# Altium PCB Term_PCB.PcbDoc
Units mm, origin at the board's own origin, x right, y up, seen from the top; angles counter-clockwise.
Board outline 80 x 65 mm, 2 copper layers (Top Layer, Bottom Layer), stack 1.57 mm thick; 64 components, 56 nets, 274 pads, 37 vias.
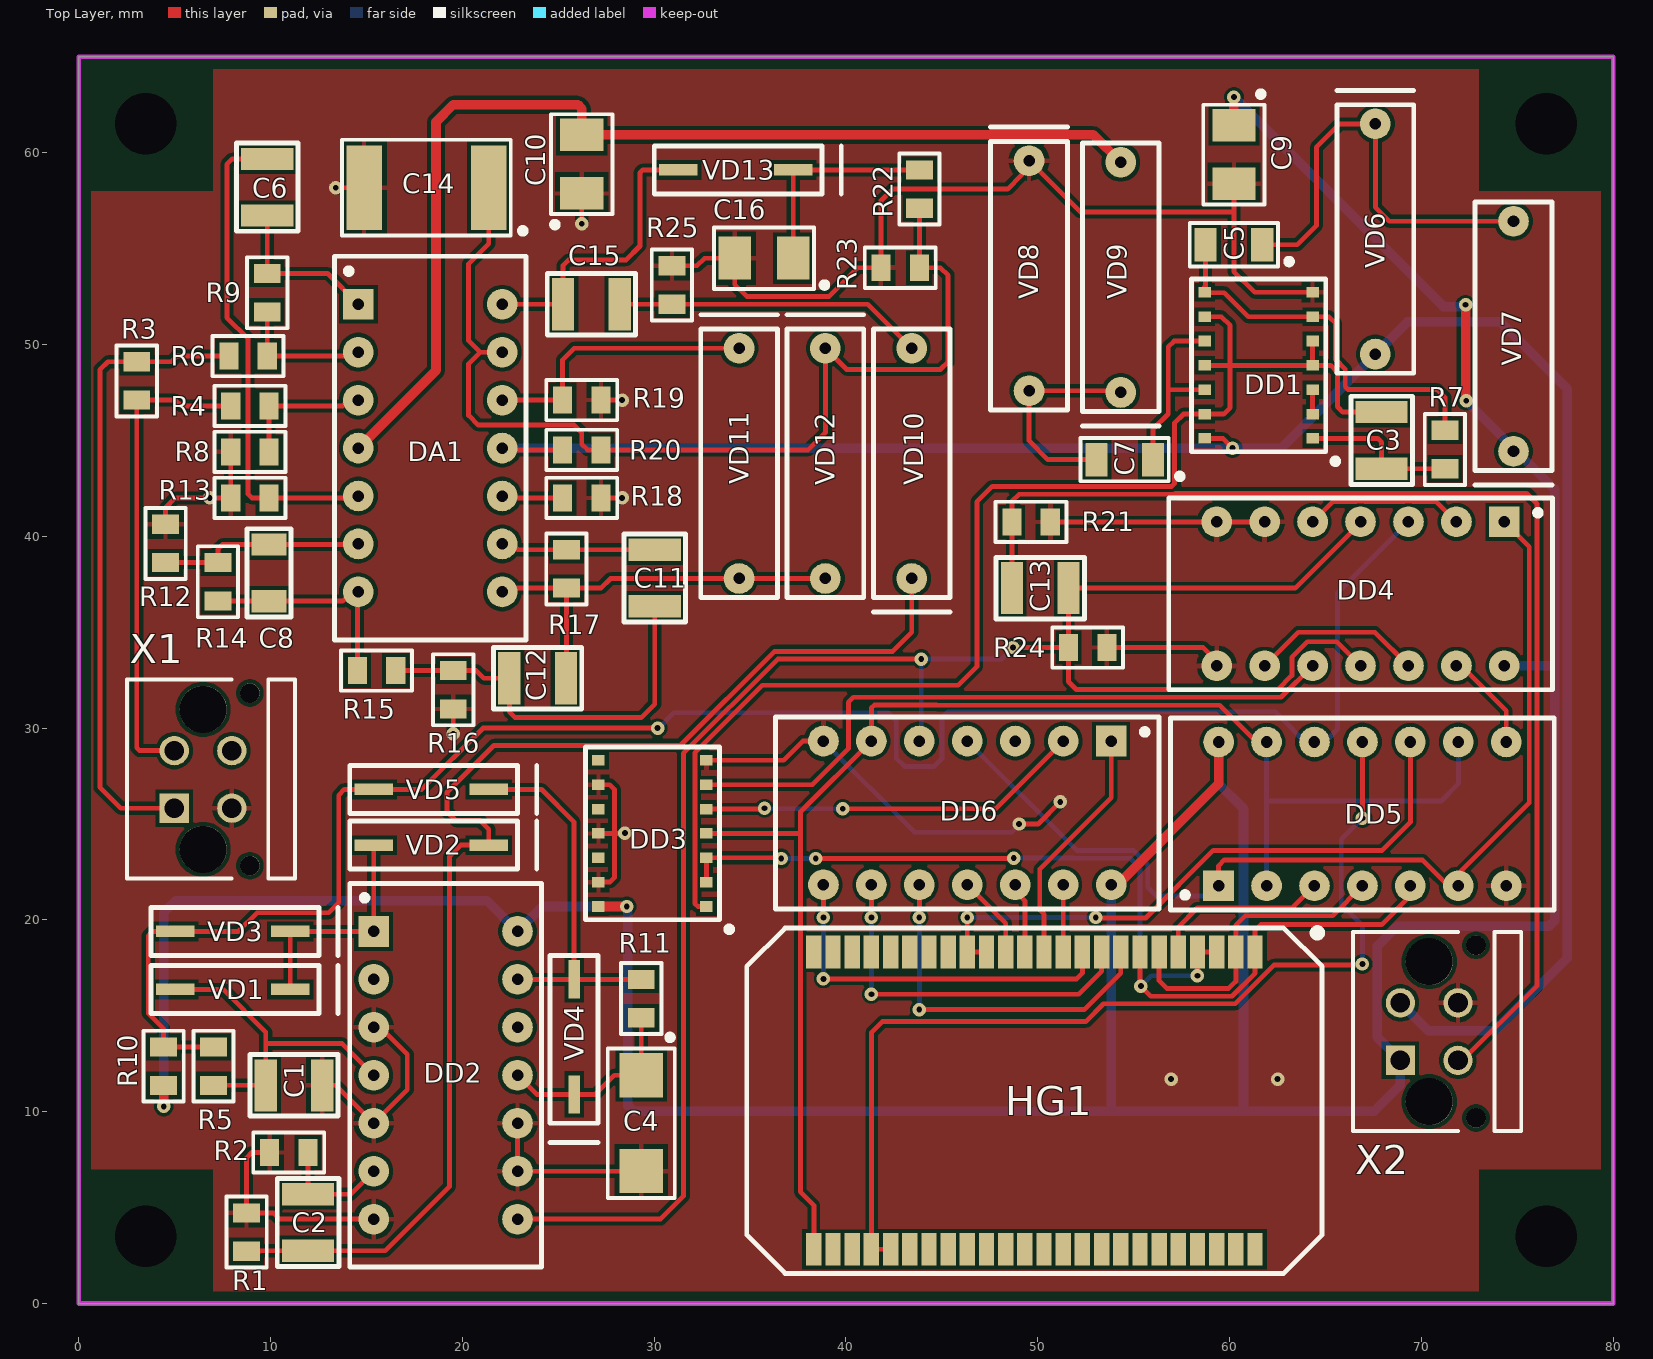
[diagram p0: Top Layer view]
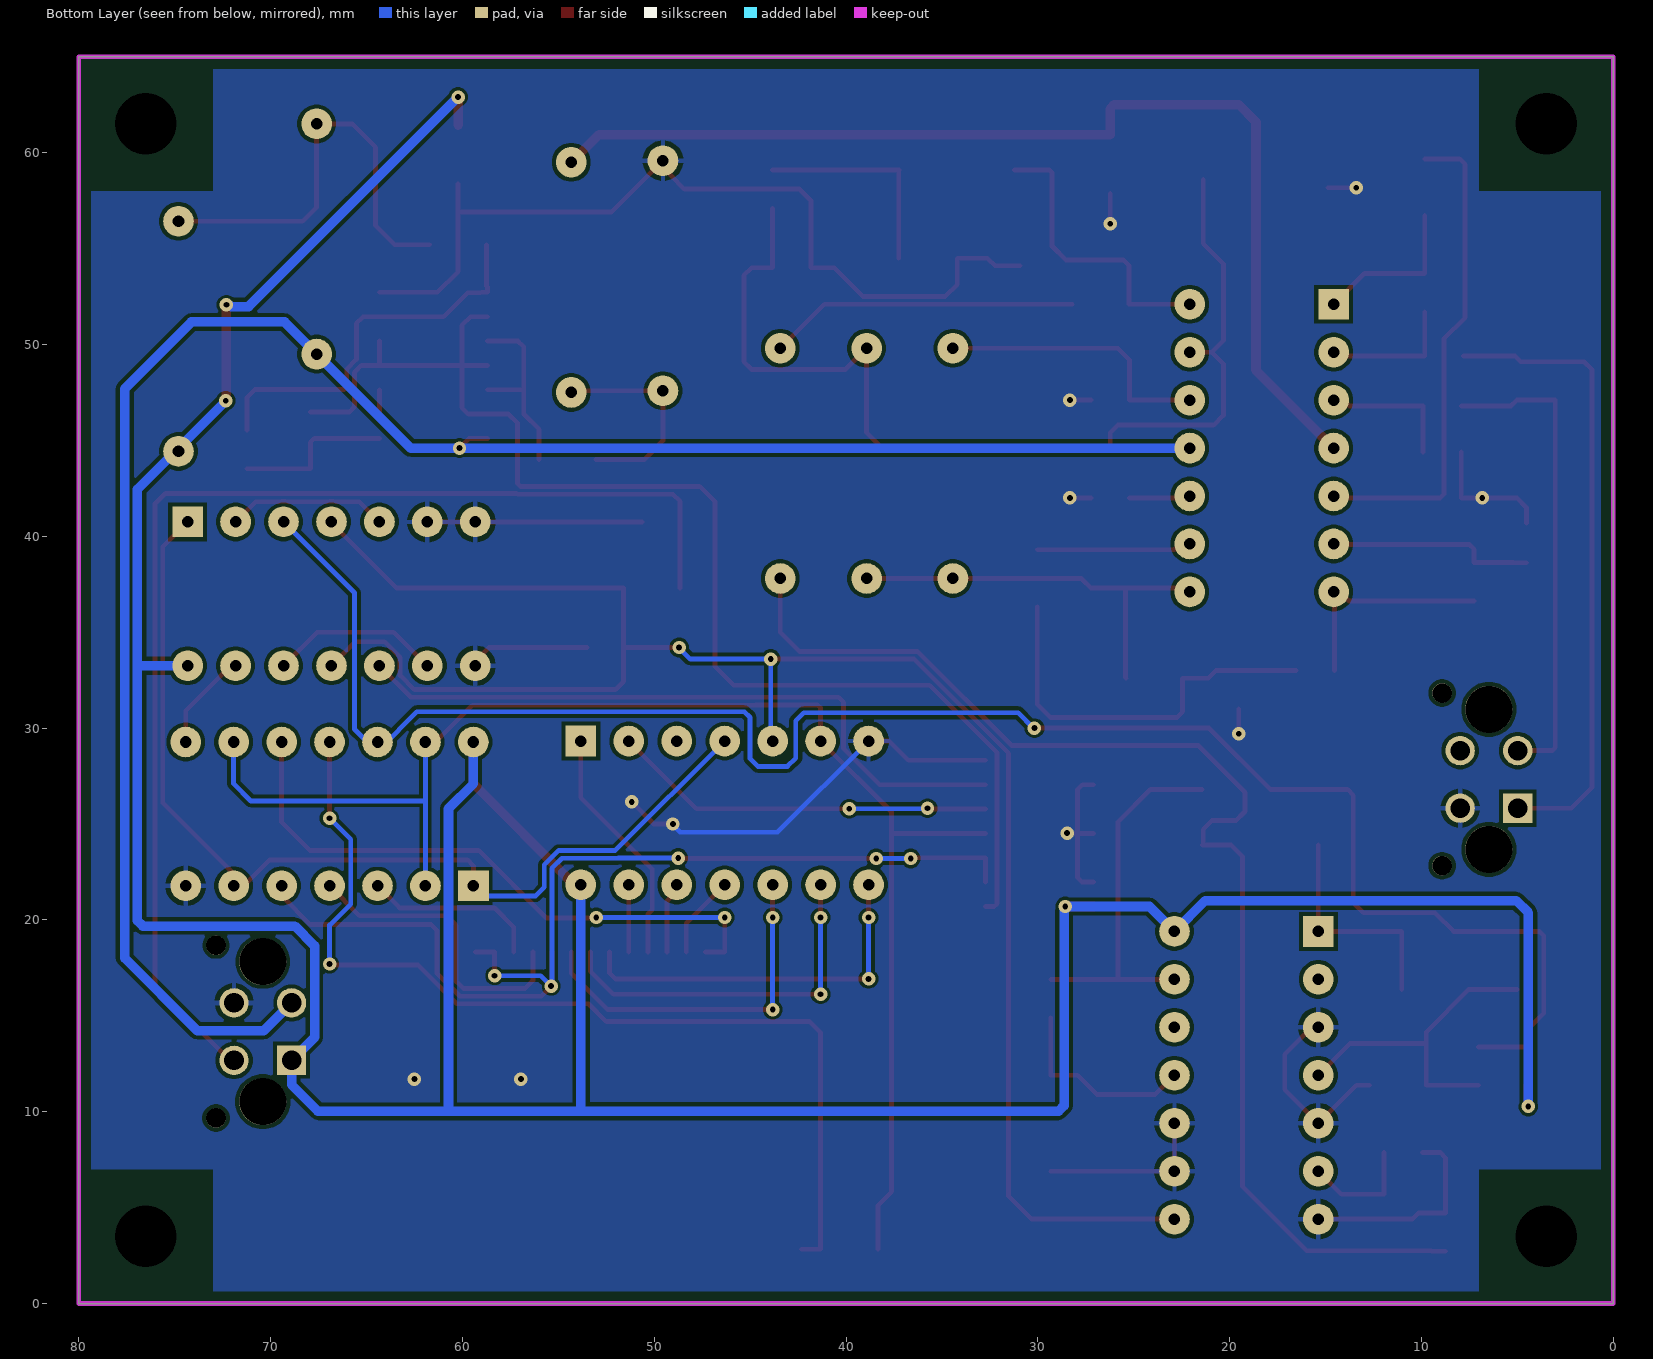
[diagram p1: Bottom Layer view, seen from below]
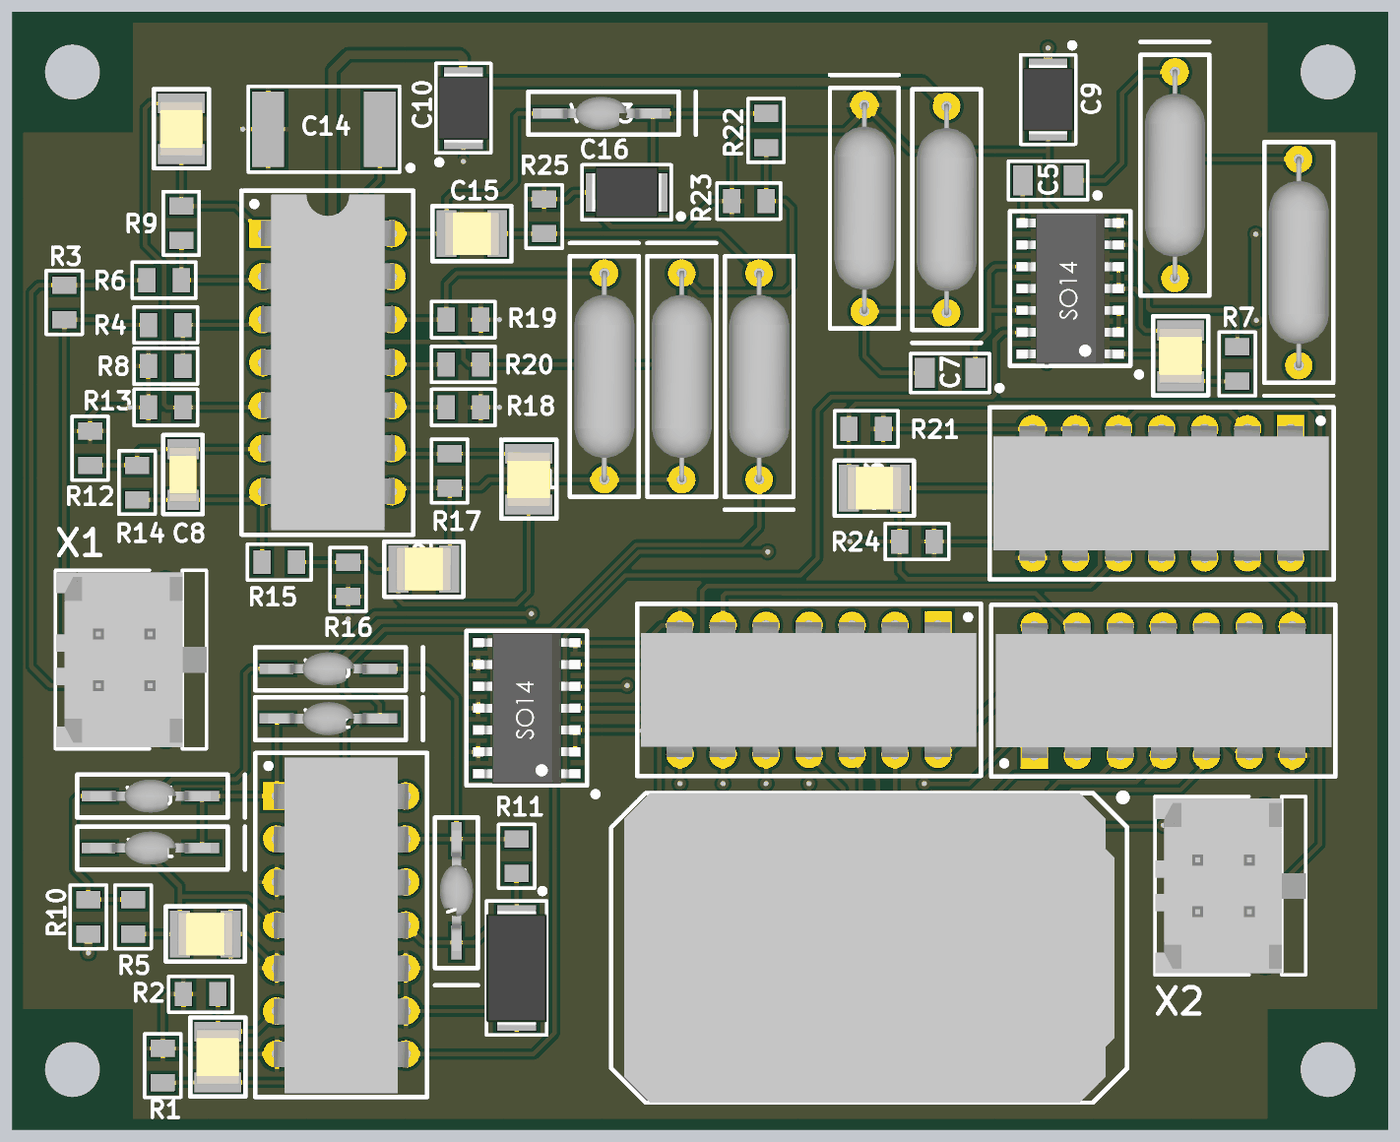
[diagram p2: 3D render of the assembled board from above, using the file's embedded part models]

## Layer stack, top to bottom
Top Solder: solder mask 0.01, Solder Resist, Dk 3.5
Top Layer: signal copper 0.035
Dielectric 1: dielectric 1.5, FR-4, Dk 4.8
Bottom Layer: signal copper 0.035
Bottom Solder: solder mask 0.01, Solder Resist, Dk 3.5

## Board outline
0,0 0,65 80,65 80,0

## Design rules (kind name [scope] priority, off if disabled: settings)
AcuteAngle [All] p1: minimum=6.00000000000000E+0001 checktracksonly=FALSE
Clearance Clearance_KeepOutLayer [OnLayer('Keep-Out Layer')] p1: gap=0.5 ignorepadtopadclearanceinfootprint=FALSE
Clearance [All] p2: gap=0.15 ignorepadtopadclearanceinfootprint=FALSE except(0.2: Track-Fill Track-Poly Track-Region SMDPad-Fill SMDPad-Poly SMDPad-Region THPad-Fill THPad-Poly THPad-Region Fill-Fill Fill-Poly Fill-Region Poly-Poly Poly-Region Region-Region)
ComponentClearance [All] p1: gap=0.2 collisioncheckmode=3 verticalgap=0.2 showdistances=FALSE
HoleSize [All] p1: absolutevalues=TRUE maxlimit=3.2 minlimit=0.3 maxpercent=80.000 minpercent=20.000
HoleToHoleClearance [All] p1: gap=0.3 allowstackedmicrovias=TRUE
MinimumAnnularRing [All] p1: minimumring=0.2
MinimumSolderMaskSliver [All] p1: minsoldermaskwidth=0.15
PolygonConnect PolygonConnect_Via [IsVia] p1: connectstyle=Direct reliefconductorwidth=0.254 reliefentries=4 polygonreliefangle="90 Angle" airgapwidth=0.254
PolygonConnect [All] p2: connectstyle=Relief reliefconductorwidth=0.25 reliefentries=4 polygonreliefangle="90 Angle" airgapwidth=0.25
RoutingVias [All] p1: holewidth=0.4 width=0.9 viastyle="Through Hole" minholewidth=0.3 minwidth=0.7 maxholewidth=0.5 maxwidth=1.1
SMDEntry [All] p1: side=TRUE corner=TRUE anyangle=FALSE
SMDNeckDown [All] p1: percent=100.000
SMDToPlane [All] p1: distance=0
SilkToSilkClearance [All] p1: silktosilkclearance=0
SilkToSolderMaskClearance [IsPad] p1: minsilkscreentomaskgap=0 clearancetoexposedcopper=FALSE
SolderMaskExpansion [All] p1: expansion=0.05 istentingtop=FALSE
Width [All] p1: maxlimit=5 minlimit=0.15 preferedwidth=0.25
24 further rules are at their usual default settings.

## Components (designator, comment, footprint, x,y, rotation, side; value= is the part's Value field where it differs from the comment)
C1 "0.47мк" 1210_CAP 11.225,11.375 r180 top
C2 "0.1мк" 1210_CAP 11.95,4.225 r90 top
C3 "6800" 1210_CAP 67.925,45 r90 top
C4 "22мк" CAP_CASE_C 29.325,9.4 r270 top
C5 "2.2мк" CAP_CASE_A 60.225,55.2 r180 top
C6 "0,15мк" 1210_CAP 9.825,58.2 r90 top
C7 "2.2мк" CAP_CASE_A 54.525,44 r180 top
C8 "4700" 1206_CAP 9.925,38.094 r270 top
C9 "4.7мк" CAP_CASE_B 60.225,59.9 r270 top
C10 "4.7мк" CAP_CASE_B 26.225,59.4 r90 top
C11 "0.068мк" 1210_CAP 30.025,37.825 r90 top
C12 "0.068мк" 1210_CAP 23.925,32.6 r0 top
C13 "0.1мк" 1210_CAP 50.125,37.3 r0 top
C14 "100мк" CAP_CASE_D 18.125,58.175 r180 top
C15 "0.15мк" 1210_CAP 26.725,52.1 r0 top
C16 "10мк" CAP_CASE_B 35.725,54.5 r180 top
DA1 "К1401УД2А бК0.348.651-02ТУ" 201.14-8 18.325,44.6 r0 top
DD1 "К561ЛН2 бК0.348.457-12ТУ" 4306.14-A 64.325,45.1 r180 top
DD2 "К561ТМ2 бК0.348.047-02ТУ" 201.14-1 19.125,11.9 r0 top
DD3 "К561ЛН2 бК0.348.457-12ТУ" 4306.14-A 32.725,20.7 r180 top
DD4 "К561ТМ2 бК0.348.047-02ТУ" 201.14-1 66.825,37 r270 top
DD5 "К561ЛП2 бК0.348.457-05ТУ" 201.14-1 66.925,25.525 r90 top
DD6 "К176ИЕ4 бК0.348.047-06ТУ" 201.14-1 46.325,25.575 r270 top
HG1 "ЦИЖ-9 ОД0.339.198 ТУ" TSIZH-9 49.825,10.575 r0 top
R1 "100к" 0805_RES 8.75,3.725 r90 top
R2 "100к" 0805_RES 10.95,7.875 r180 top
R3 "220к" 0805_RES 3.025,48.1 r90 top
R4 "220к" 0805_RES 8.925,46.794 r0 top
R5 "910к" 0805_RES 7.025,12.375 r90 top
R6 "220к" 0805_RES 8.825,49.394 r0 top
R7 "220к" 0805_RES 71.225,44.525 r90 top
R8 "3,9М" 0805_RES 8.925,44.4 r0 top
R9 "3,9М" 0805_RES 9.825,52.7 r90 top
R10 "100к" 0805_RES 4.425,12.375 r270 top
R11 "1,8М" 0805_RES 29.325,15.9 r90 top
R12 "10к" 0805_RES 4.525,39.625 r270 top
R13 "100к" 0805_RES 8.925,42 r0 top
R14 "1,6М" 0805_RES 7.253,37.633 r270 top
R15 "68к" 0805_RES 15.525,33 r0 top
R16 "27к" 0805_RES 19.525,32 r90 top
R17 "1,2М" 0805_RES 25.425,38.3 r270 top
R18 "100к" 0805_RES 26.225,42 r180 top
R19 "20к" 0805_RES 26.225,47.1 r180 top
R20 "3,9М" 0805_RES 26.225,44.5 r0 top
R21 "1М" 0805_RES 49.65,40.75 r180 top
R22 "56к" 0805_RES 43.825,58.1 r90 top
R23 "20к" 0805_RES 42.825,54 r0 top
R24 "20к" 0805_RES 52.6,34.2 r0 top
R25 "100к" 0805_RES 30.925,53.1 r270 top
VD1 "КД103А ТТ3.362.082ТУ" KD103A 5.025,16.375 r0 top
VD2 "КД103А ТТ3.362.082ТУ" KD103A 15.375,23.9 r0 top
VD3 "КД103А ТТ3.362.082ТУ" KD103A 5.025,19.4 r0 top
VD4 "КД103А ТТ3.362.082ТУ" KD103A 25.825,16.9 r270 top
VD5 "КД103А ТТ3.362.082ТУ" KD103A 15.375,26.8 r0 top
VD6 "Д9Е аА0.336.473ТУ" D9E 67.6,55.5 r90 top
VD7 "Д9Е аА0.336.473ТУ" D9E 74.8,50.425 r270 top
VD8 "Д9Е аА0.336.473ТУ" D9E 49.543,53.584 r90 top
VD9 "Д9Е аА0.336.473ТУ" D9E 54.325,53.5 r270 top
VD10 "Д9Е аА0.336.473ТУ" D9E 43.425,43.8 r270 top
VD11 "Д9Е аА0.336.473ТУ" D9E 34.425,43.8 r90 top
VD12 "Д9Е аА0.336.473ТУ" D9E 38.925,43.8 r90 top
VD13 "КД103А ТТ3.362.082ТУ" KD103A 31.25,59.1 r0 top
X1 "СНП368-4РО21-2 ОТК РЮМК.430420.076 ТУ" MOLEX_0430450427 6.95,27.325 r90 top
X2 "СНП368-4РО21-2 ОТК РЮМК.430420.076 ТУ" MOLEX_0430450427 70.875,14.175 r90 top

## Footprints (in the part's own frame and the unit in brackets; to place one, negate y for a bottom-side part, rotate by r counter-clockwise, add the part's x,y. Pads: shape width x height; smd on the part's side, far side on the other; paste and mask are expansions set on the pad)
201.14-1 [mm]
  rect 1.6x1.6 / inner round 1.6 / far side rect 1.6x1.6 hole 0.6: 1(-3.75,7.5)
  round 1.6 hole 0.6: 2(-3.75,5) 3(-3.75,2.5) 4(-3.75,0) 5(-3.75,-2.5) 6(-3.75,-5) 7(-3.75,-7.5) 8(3.75,-7.5) 9(3.75,-5) 10(3.75,-2.5) 11(3.75,0) 12(3.75,2.5) 13(3.75,5) 14(3.75,7.5)
  silkscreen extent -5,-10 5,10, body extent -3.92,-9.77 3.92,9.73, height 5.5
201.14-8 [mm]
  rect 1.6x1.6 / inner round 1.6 / far side rect 1.6x1.6 hole 0.6: 1(-3.75,7.5)
  round 1.6 hole 0.6: 2(-3.75,5) 3(-3.75,2.5) 4(-3.75,0) 5(-3.75,-2.5) 6(-3.75,-5) 7(-3.75,-7.5) 8(3.75,-7.5) 9(3.75,-5) 10(3.75,-2.5) 11(3.75,0) 12(3.75,2.5) 13(3.75,5) 14(3.75,7.5)
  silkscreen extent -5,-10 5,10, body extent -3.88,-9.72 3.92,9.78, height 5.5
0805_RES [mm] "Р1-8 (Эркон)"
  rect 1x1.4 smd mask+0.05: 1(-1,0) 2(1,0)
  silkscreen extent -1.85,-1.05 1.85,1.05, body extent -1,-0.62 1,0.63, height 0.55
1206_CAP [mm]
  rect 1.16x1.82 smd: 1(1.475,0) 2(-1.475,0)
  silkscreen extent -2.3,-1.15 2.3,1.15, body extent -1.6,-0.81 1.6,0.81, height 0.57
1210_CAP [mm]
  rect 1.16x2.72 smd: 1(1.475,0) 2(-1.475,0)
  silkscreen extent -2.3,-1.61 2.3,1.6, body extent -1.6,-1.26 1.6,1.26, height 0.57
4306.14-A [mm]
  rect 0.65x0.55 smd: 1(0,0) 2(0,-1.27) 3(0,-2.54) 4(0,-3.81) 5(0,-5.08) 6(0,-6.35) 7(0,-7.62) 8(5.63,-7.62) 9(5.63,-6.35) 10(5.63,-5.08) 11(5.63,-3.81) 12(5.63,-2.54) 13(5.63,-1.27) 14(5.63,0)
  silkscreen extent -1.34,-8.31 6.31,1.34, body extent -0.28,-8.19 5.91,0.57, height 1.75
CAP_CASE_A [mm] "Танталовый, тип А"
  rect 1.15x1.75 smd: 1(-1.475,0) 2(1.475,0)
  silkscreen extent -3.03,-1.13 2.3,1.13, body extent -1.1,-0.8 1.1,0.8, height 0.6
CAP_CASE_B [mm] "Molded Capacitor, 2-Leads, Body 3,60x2,90mm, IPC Medium Density"
  rect 1.7x2.25 smd: 1(-1.525,0) 2(1.525,0)
  silkscreen extent -3.3,-1.6 2.6,1.6, body extent -2.07,-1.5 2.07,1.5, height 2
CAP_CASE_C [mm]
  rect 2.3x2.25 smd: 1(-2.5,0) 2(2.5,0)
  silkscreen extent -4.62,-1.75 3.9,1.75, body extent -3.37,-1.75 3.37,1.75, height 2.5
CAP_CASE_D [mm]
  rect 1.85x4.4 smd: 1(-3.25,0) 2(3.25,0)
  silkscreen extent -5.17,-2.5 4.4,2.5, body extent -3.65,-2.15 3.65,2.15, height 2.8
D9E [mm]
  round 1.6 hole 0.6: A(-6,0) K(6,0)
  silkscreen extent -7,-2 7.75,2, body extent -6.15,-1.75 6.15,1.75, height 3.48
KD103A [mm]
  rect 2x0.6 smd: A(0,0) K(6,0)
  silkscreen extent -1.25,-1.25 8.5,1.25, body extent -0.5,-1 6.5,0.99, height 2.2
MOLEX_0430450427 [mm]
  rect 1.53x1.53 hole 1.02: 1(-1.5,1.97)
  round 1.53 hole 1.02: 2(-1.5,-1.03) 3(1.5,1.97) 4(1.5,-1.03)
  round 1.02 hole 1.02 unplated mask+0: ""(-4.5,-1.97) ""(4.5,-1.97)
  round 2.45 / inner rrect50% 2.4x1 / far side round 2.45 hole 2.45 unplated mask+0: ""(-3.65,0.47) ""(3.65,0.47)
  silkscreen extent -5.18,-4.33 5.2,4.44, body extent -5.07,-4.36 5.07,4.42, height 9.95
TSIZH-9 [mm] "ЦИЖ-9"
  rect 0.8x1.7 smd mask+0.02: 1(-11.5,7.75) 2(-10.5,7.75) 3(-9.5,7.75) 4(-8.5,7.75) 5(-7.5,7.75) 6(-6.5,7.75) 7(-5.5,7.75) 8(-4.5,7.75) 9(-3.5,7.75) 10(-2.5,7.75) 11(-1.5,7.75) 12(-0.5,7.75) 13(0.5,7.75) 14(1.5,7.75) 15(2.5,7.75) 16(3.5,7.75) 17(4.5,7.75) 18(5.5,7.75) 19(6.5,7.75) 20(7.5,7.75) 21(8.5,7.75) 22(9.5,7.75) 23(10.5,7.75) 24(11.5,7.75) 25(11.5,-7.75) 26(10.5,-7.75) 27(9.5,-7.75) 28(8.5,-7.75) 29(7.5,-7.75) 30(6.5,-7.75) 31(5.5,-7.75) 32(4.5,-7.75) 33(3.5,-7.75) 34(2.5,-7.75) 35(1.5,-7.75) 36(0.5,-7.75) 37(-0.5,-7.75) 38(-1.5,-7.75) 39(-2.5,-7.75) 40(-3.5,-7.75) 41(-4.5,-7.75) 42(-5.5,-7.75) 43(-6.5,-7.75) 44(-7.5,-7.75) 45(-8.5,-7.75) 46(-9.5,-7.75) 47(-10.5,-7.75) 48(-11.5,-7.75)
  silkscreen extent -15,-9 15,9, body extent -14.25,-9 14.25,9, height 2.15

## Part data
C1: library part Capacitor, Case=1210, Dielectric=Н90, Tolerance=±10%, ValueDescription=Конденсатор, ValueManufacturerPartNumber="К10-17в-Н90-0.47мк±10%-4 ОЖО.460.107 ТУ", Voltage=50, ValueType=Конденсатор
C2 C13: library part Capacitor, Case=1210, Dielectric=Н90, Tolerance=±10%, ValueDescription=Конденсатор, ValueManufacturerPartNumber="К10-17в-Н90-0.1мк±10%-4 ОЖО.460.107 ТУ", Voltage=50, ValueType=Конденсатор
C3: library part Capacitor, Case=1210, Dielectric=Н90, Tolerance=±10%, ValueDescription=Конденсатор, ValueManufacturerPartNumber="К10-17в-Н90-6800±10%-4 ОЖО.460.107 ТУ", Voltage=50, ValueType=Конденсатор
C4: library part Capacitor_pol, ValueDescription=Конденсатор, ValueManufacturerPartNumber="К53-56а-6.3В-22мк±10% АДПК.673546.005 ТУ", ValueType="Полярный конденсатор"
C5 C7: library part Capacitor_pol, ValueDescription=Конденсатор, ValueManufacturerPartNumber="К53-56а-10В-2.2мк±10% АДПК.673546.005 ТУ", ValueType="Полярный конденсатор"
C6 C15: library part Capacitor, Case=1210, Dielectric=Н90, Tolerance=±10%, ValueDescription=Конденсатор, ValueManufacturerPartNumber="К10-17в-Н90-0.15мк±10%-4 ОЖО.460.107 ТУ", Voltage=50, ValueType=Конденсатор
C8: library part Capacitor, Case=1206, Dielectric=Н90, Tolerance=±10%, ValueDescription=Конденсатор, ValueManufacturerPartNumber="К10-17в-Н90-4700±10%-3 ОЖО.460.107 ТУ", Voltage=50, ValueType=Конденсатор
C9 C10: library part Capacitor_pol, ValueDescription=Конденсатор, ValueManufacturerPartNumber="К53-56а-10В-4.7мк±10% АДПК.673546.005 ТУ", ValueType="Полярный конденсатор"
C11 C12: library part Capacitor, Case=1210, Dielectric=Н90, Tolerance=±10%, ValueDescription=Конденсатор, ValueManufacturerPartNumber="К10-17в-Н90-0.068мк±10%-4 ОЖО.460.107 ТУ", Voltage=50, ValueType=Конденсатор
C14: library part Capacitor_pol, ValueDescription=Конденсатор, ValueManufacturerPartNumber="К53-56а-6.3В-100мк±10% АДПК.673546.005 ТУ", ValueType="Полярный конденсатор"
C16: library part Capacitor_pol, ValueDescription=Конденсатор, ValueManufacturerPartNumber="К53-56а-6.3В-10мк±10% АДПК.673546.005 ТУ", ValueType="Полярный конденсатор"
DA1: library part K1401UD2A, ValueDescription=Микросхема, ValueManufacturerPartNumber="К1401УД2А бК0.348.651-02ТУ"
DD1 DD3: library part K561LN2, ValueDescription=Микросхема, ValueManufacturerPartNumber="К561ЛН2 бК0.348.457-12ТУ"
DD2 DD4: library part K176TM2, ValueDescription=Микросхема, ValueManufacturerPartNumber="К561ТМ2 бК0.348.047-02ТУ"
DD5: library part K561LP2, ValueDescription=Микросхема, ValueManufacturerPartNumber="К561ЛП2 бК0.348.457-05ТУ"
DD6: library part K176IE4, ValueDescription=Микросхема, ValueManufacturerPartNumber="К176ИЕ4 бК0.348.047-06ТУ"
HG1: library part TsIZh-9, ValueDescription="Индикатор символьный", ValueManufacturerPartNumber="ЦИЖ-9 ОД0.339.198 ТУ"
R1: library part Resistor_Horizontal, Case=0805, Power=0,125, ValueDescription=Резистор, ValueManufacturerPartNumber=0,125100к, ValueType=Резистор
R2 R4 R5 R6 R7 R9 R11 R14 R15 R22: library part Resistor_Horizontal, Case=0805, Power=0,125, ValueDescription=Резистор, ValueType=Резистор
R3: library part Resistor_Vertical, Power=0,125, ValueDescription=Резистор, ValueType=Резистор
R8 R10 R12 R13 R16 R17 R18 R19 R20 R21 R23 R24 R25: library part Resistor_Vertical, Case=0805, Power=0,125, ValueDescription=Резистор, ValueType=Резистор
VD1 VD2 VD3 VD4 VD5 VD6 VD7 VD8 VD9 VD10 VD11 VD12 VD13: library part Diode, ValueType=Диод
  VD1 VD2 VD3 VD4 VD5 VD13: ValueManufacturerPartNumber="КД103А ТТ3.362.082ТУ"
  VD6 VD7 VD8 VD9 VD10 VD11 VD12: ValueManufacturerPartNumber="Д9Е аА0.336.473ТУ"
X1 X2: library part "Header 2x2", ValueType=Розетка, ValueManufacturerPartNumber="СНП368-4РО21-2 ОТК РЮМК.430420.076 ТУ"
  X1: Str1=E1, Str2=E2, Str3=E3
  X2: Str1=Cчёт+, Str2=Счёт-, Str3="+3 В", Str4=Общий

## Free pads (board coordinates)
  round 0 hole 3.2 unplated mask+0: ""(3.5,3.5) ""(3.5,61.5) ""(76.5,3.5) ""(76.5,61.5)

## Via types
v1: diameter 0.7, hole 0.3, Top Layer to Bottom Layer, tented both sides, 37 vias

## Nets (pads, with @x,y where several pads share a name; then routed paths per layer and width w, separated by ;. In a path a pad name is that pad's centre, name@x,y a point inside that pad or via, vN(x,y) a via of type N, cw(c..) or ccw(c..) an arc to the next point about the centre after c; other vN are vias at no path point)
1: DD3.2 DD3.3 DD5.5 HG1.18 HG1.21 HG1.22 HG1.24 | length 55.1
  Top Layer w0.25: DD3.2 DD3.3 v1@36.485,23.24 ; v1@36.585,23.24 v1(36.625,23.2) ; v1(38.425,23.2) 48.725,23.2 v1(48.75,23.225) ; HG1.18 55.325,16.6 v1(55.375,16.55) 55.9,16.025 60.125,16.025 61.325,17.225 HG1.24 61.325,19.45 61.633,19.758 67.933,19.758 DD5.5@69.425,21.25 ; v1(58.32,17.09) 58.325,17.095 HG1.21 HG1.22
  Bottom Layer w0.25: v1(36.625,23.2) v1(38.425,23.2) ; v1(48.75,23.225) 51.854,23.225 51.861,23.218 54.807,23.218 55.329,22.696 55.329,16.596 v1(55.375,16.55) 55.915,17.09 v1(58.32,17.09)
2: DD5.3 HG1.20 | length 9.3
  Top Layer w0.25: HG1.20 57.325,19.625 58.325,20.625 63.275,20.625 DD5.3
3: C13.1 DD2.8 DD4.4 DD4.11 DD6.5 R24.1 | length 98.6
  Top Layer w0.25: DD2.8 30.325,4.4 31.525,5.6 31.525,28.683 36.442,33.6 v1(43.925,33.6) ; v1(48.7,34.2) R24.1 ; DD4.11 65.575,34.5 64.052,34.5 63.248,33.696 63.248,32.744 62.512,32.008 52.017,32.008 51.6,32.425 R24.1 ; DD4.4 66.825,40.7 63.425,37.3 C13.1 R24.1
  Bottom Layer w0.25: DD6.5@43.825,28.75 43.925,28.85 v1(43.925,33.6) 48.125,33.6 v1@48.725,34.2
4: DD5.4 HG1.19 HG1.23 | length 16.4
  Top Layer w0.25: HG1.19 56.325,16.825 56.725,16.425 59.959,16.425 60.325,16.791 HG1.23 60.325,19.725 60.821,20.221 65.371,20.221 DD5.4 ; DD5.4@66.925,21.1 DD5.4@66.925,21.25
5: DD5.11 HG1.44 HG1.45 | length 51.3
  Top Layer w0.25: HG1.44 HG1.45 41.325,14.125 41.898,14.698 52.498,14.698 53.425,15.625 60.296,15.625 62.321,17.65 v1@66.918,17.65 ; v1(66.925,25.3) DD5.11@66.925,28.75
  Bottom Layer w0.25: v1(66.925,17.7) 66.925,19.727 65.825,20.827 65.825,24.2 v1(66.925,25.3)
6: DD6.8 HG1.15 | length 19.6
  Top Layer w0.25: v1(38.825,16.925) 52.025,16.925 52.325,17.225 HG1.15 ; v1(38.825,20.125) DD6.8
  Bottom Layer w0.25: v1(38.825,16.925) v1(38.825,20.125)
7: DD6.9 HG1.16 | length 19.2
  Top Layer w0.25: v1(41.325,16.125) 52.125,16.125 53.325,17.325 HG1.16 ; v1(41.325,20.125) DD6.9
  Bottom Layer w0.25: v1(41.325,16.125) v1(41.325,20.125)
8: DD6.10 HG1.17 | length 18.9
  Top Layer w0.25: v1(43.825,15.325) 52.425,15.325 54.325,17.225 HG1.17 ; v1(43.825,20.125) DD6.10
  Bottom Layer w0.25: v1(43.825,15.325) v1(43.825,20.125)
9: DD6.11 HG1.11 | length 4.3
  Top Layer w0.25: DD6.11 48.325,19.825 HG1.11
10: DD6.12 HG1.12 | length 3.7
  Top Layer w0.25: DD6.12 48.825,21.503 49.325,21.003 HG1.12
11: DD6.13 HG1.14 | length 3.5
  Top Layer w0.25: HG1.14 DD6.13@51.325,21.775
12: DD6.1 HG1.13 | length 12.6
  Top Layer w0.25: HG1.13 50.325,20.3 50.1,20.525 50.1,22.65 53.825,26.375 DD6.1
14: DD5.10 HG1.9 HG1.10 | length 31.6
  Top Layer w0.25: v1(46.325,20.125) 46.325,19.175 HG1.9 HG1.10 ; v1@53.065,20.1 55.625,20.1 59.15,23.625 67.95,23.625 69.425,25.1 DD5.10@69.425,28.75
  Bottom Layer w0.25: v1(46.325,20.125) v1(53.025,20.125)
15: DD3.4 DD5.2 DD5.9 DD5.13 DD6.6 HG1.48 | length 76.7
  Top Layer w0.25: DD3.4 37.625,24.51 ; HG1.48 38.325,5.125 37.625,5.825 37.625,24.51 ; DD6.6@41.325,28.75 DD6.6 ; DD5.13@61.925,28.75 59.483,31.192 44.733,31.192 44.725,31.2 41.474,31.2 41.325,31.051 DD6.6 ; 37.625,24.51 37.625,25.625 DD6.6
  Bottom Layer w0.25: DD5.2@61.925,21.25 61.925,26.2 ; DD5.13@61.925,28.75 61.925,26.2 ; DD5.9@71.925,28.75 71.925,27.1 71.025,26.2 61.925,26.2
"+3 В": DA1.11 DD1.14 R20.1 VD6.A X2.3 | length 105.1
  Top Layer w0.25: DA1.11 22.175,44.5 R20.1 ; DD1.14 59.65,45.1 v1(60.15,44.6)
  Bottom Layer w0.5: DA1.11 v1(60.15,44.6) 62.7,44.6 69.275,51.175 74.125,51.175 77.6,47.7 77.6,18 73.825,14.225 70.35,14.225 70.35,14.23 X2.3
"+5 В": C9.1 DD2.14 DD3.14 DD4.14 DD5.14 DD6.14 R10.2 VD7.K X2.1 | length 203.2
  Top Layer w0.5: v1(4.425,10.275) R10.2 ; DD3.14 v1(28.57,20.7) ; DD6.14 54.15,21.825 59.425,27.1 DD5.14 ; C9.1 v1(60.225,62.9) ; v1(72.3,52.074) 72.3,47.1 v1(72.337,47.063)
  Bottom Layer w0.5: v1(4.425,10.275) 4.425,20.375 5.05,21 21.275,21 DD2.14 24.175,20.7 v1(28.57,20.7) 28.608,20.662 28.608,20.52 28.625,20.504 28.625,17.525 28.625,10.318 28.918,10.025 53.775,10.025 ; DD6.14 53.825,10.075 53.775,10.025 ; DD5.14 59.425,27.1 60.725,25.8 60.725,10.1 ; v1(60.225,62.9) 71.15,51.975 72.059,51.975 72.12,52.036 72.262,52.036 v1(72.3,52.074) ; v1(72.337,47.063) 76.95,42.45 76.95,19.968 76.657,19.675 68.732,19.675 67.7,18.643 67.7,13.88 X2.1 68.905,11.405 67.525,10.025 53.775,10.025 ; DD4.14 76.657,33.25
"-1,2 В": C10.2 DA1.4 VD9.A | length 56.8
  Top Layer w0.5: DA1.4 18.625,48.65 18.625,61.6 19.525,62.5 26.025,62.5 26.225,62.3 C10.2 52.9,60.925 VD9.A
GND: C1.2 C4.2 C9.2 C10.1 C14.2 C16.2 DD1.7 DD2.3 DD2.5 DD2.7 DD2.9 DD2.10 DD3.7 DD3.9 DD3.11 DD3.13 DD4.6 DD4.7 DD4.8 DD5.7 DD6.7 R1.2 R2.2 R8.1 R12.1 R13.1 R16.1 R18.1 R19.1 R21.1 R23.1 R24.2 R25.1 VD8.K X1.2 X2.4 | length 136.8
  Top Layer w0.25: R12.1@4.525,40.7 4.525,41.5 5.025,42 v1(6.825,42) R13.1 R8.1 ; R2.2 9.025,7.875 8.75,7.6 R1.2 10.15,4.725 10.475,4.4 DD2.7 ; C1.2 13.4,11.375 DD2.5 17.125,11.15 17.125,13 15.725,14.4 DD2.3 ; v1(13.4,58.175) C14.2 ; v1(19.525,29.7) R16.1 ; DD2.10 DD2.9 C4.2 ; v1(26.225,56.3) C10.1 ; DD3.13 27.695,21.97 27.925,22.2 27.925,24.51 ; DD3.11 27.925,24.51 ; DD3.9 27.675,27.05 27.925,26.8 27.925,24.51 ; R18.1 v1(28.325,42) ; R19.1 v1(28.325,47.1) ; v1(28.475,24.525) 28.46,24.51 27.925,24.51 ; R25.1 32.225,54.1 32.625,54.5 C16.2 34.2,53.125 34.821,52.504 39.125,52.504 40.621,54 R23.1 41.825,57.5 42.425,58.1 48.425,58.1 49.145,58.82 49.145,58.822 49.543,59.22 VD8.K 52.227,56.9 60.225,56.9 ; DD3.7 36.745,28.32 37.75,29.325 DD6.7 ; v1(49.025,25) 50.025,25 v1(51.175,26.15) ; R21.1@50.625,40.75 56.875,40.75 DD4.7 DD4.6 ; R24.2@53.5,34.2 R24.2 ; R24.2@53.625,34.2 58.625,34.2 59.325,33.5 DD4.8 ; C9.2 60.225,56.9 ; DD1.7 61.305,52.72 60.225,53.8 60.225,56.9
  Bottom Layer w0.25: DD6.7 43.575,24.575 48.65,24.575 48.975,24.9 48.975,24.95 v1(49.025,25)
  other v1: 56.95,11.7 62.5,11.7
NetC1_1: C1.1 DD2.4 R5.1 VD1.A | length 17.5
  Top Layer w0.25: VD1.A 7.525,16.375 9.75,14.15 9.75,13.55 ; R5.1 7.725,11.375 C1.1 9.75,13.55 ; DD2.4 13.725,13.55 9.75,13.55
NetC2_1: C2.1 DD2.6 R2.1 | length 6.1
  Top Layer w0.25: R2.1 11.95,7.175 C2.1 14.175,5.7 DD2.6
NetC2_2: C2.2 R1.1 VD2.K VD10.K | length 66.4
  Top Layer w0.25: R1.1 9.45,2.725 9.475,2.75 C2.2 15.975,2.75 19.325,6.1 19.325,23.3 19.925,23.9 VD2.K@21.425,23.9
  Top Layer w0.254: VD2.K 21.375,24.725 20.925,25.175 19.675,25.175 19.2,25.65 19.2,26.65 21.65,29.1 31.373,29.1 36.275,34.002 42.427,34.002 43.425,35 VD10.K
NetC3_1: C3.1 DD1.4 DD1.5 DD1.9 DD1.11 DD1.13 DD3.1 | length 69.1
  Top Layer w0.25: DD3.1 32.274,20.7 32.123,20.851 32.123,28.71 35.644,32.231 45.849,32.231 46.825,33.207 46.825,41.8 47.625,42.6 56.976,42.6 57.125,42.749 57.125,45.9 57.595,46.37 DD1.13 59.695,46.37 60.025,46.7 60.025,48.91 ; DD1.11 60.025,48.91 ; DD1.9 59.575,51.45 60.025,51 60.025,48.91 ; DD1.5 DD1.4 ; C3.1 65.9,46.475 65.625,46.75 65.625,48.55 65.265,48.91 DD1.4 ; 60.025,48.91 DD1.4
NetC3_2: C3.2 DD1.1 R7.1 | length 8.4
  Top Layer w0.25: DD1.1 67.725,45.1 67.925,44.9 C3.2 R7.1
NetC4_1: C4.1 DD2.11 R11.1 VD4.K | length 10.3
  Top Layer w0.25: DD2.11 23.875,10.9 VD4.K 26.925,10.9 27.925,11.9 C4.1 R11.1
NetC5_1: C5.1 VD6.K VD7.A | length 22.7
  Top Layer w0.25: C5.1 63.525,55.2 64.525,56.2 64.525,60.275 65.75,61.5 VD6.K 67.6,57.15 68.325,56.425 VD7.A
NetC5_2: C5.2 DD1.6 DD1.8 R7.2 | length 20.7
  Top Layer w0.25: C5.2 58.75,53.05 58.695,52.995 DD1.8 59.02,52.72 59.04,52.7 59.725,52.7 60.975,51.45 65.175,51.45 65.523,51.102 65.523,49.223 66.029,48.717 66.029,47.799 66.178,47.65 70.825,47.65 71.225,47.25 R7.2
NetC6_1: C6.1 DA1.5 R13.2 | length 25.9
  Top Layer w0.25: C6.1 8,59.675 7.725,59.4 7.725,51.4 8.825,50.3 8.825,42.2 9.025,42 R13.2 DA1.5@14.473,42 ; DA1.5@14.573,41.9 DA1.5@14.473,42 ; DA1.5 14.475,42 DA1.5@14.473,42
NetC6_2: C6.2 DA1.1 R9.2 | length 8.4
  Top Layer w0.25: C6.2 R9.2 12.975,53.7 DA1.1
NetC7_1: C7.1 DD1.10 DD1.12 | length 10.1
  Top Layer w0.25: C7.1 56,45.575 56.8,46.375 56.8,47.64 ; DD1.12 56.8,47.64 ; DD1.10 57.105,50.18 56.8,49.875 56.8,47.64
NetC7_2: C7.2 VD8.A VD9.K | length 11.3
  Top Layer w0.25: C7.2 50.525,44 49.543,44.982 VD8.A 54.241,47.584 VD9.K
NetC8_1: C8.1 DA1.7 R14.2 R15.1 | length 11.6
  Top Layer w0.25: R14.2 7.953,36.633 7.966,36.619 C8.1 13.753,36.619 14.234,37.1 DA1.7 14.525,37.05 R15.1
NetC8_2: C8.2 DA1.6 R12.2 R14.1 | length 10.9
  Top Layer w0.25: R12.2 5.225,38.625 5.233,38.633 R14.1 7.253,39.328 7.494,39.569 C8.2 14.544,39.569 DA1.6
NetC11_1: C11.1 DA1.9 R17.1 | length 8.1
  Top Layer w0.25: DA1.9 22.333,39.342 22.854,39.342 22.897,39.3 R17.1 28.665,39.3 C11.1
NetC11_2: C11.2 C12.2 R15.2 R16.2 | length 20.8
  Top Layer w0.25: R15.2 18.825,33 R16.2 20.725,33 21.125,32.6 C12.2@22.35,32.6 ; C12.2 22.45,30.85 22.75,30.55 29.325,30.55 30.025,31.25 C11.2@30.025,36.325
NetC12_1: C12.1 DA1.8 R17.2 VD11.A VD12.A | length 21.9
  Top Layer w0.25: DA1.8 22.275,37.3 R17.2 ; C12.1 25.425,32.625 R17.2 ; VD12.A VD11.A 27.725,37.8 27.225,37.3 R17.2
NetC14_1: C14.1 DA1.13 R20.2 R22.1 R23.2 VD12.K | length 55.1
  Top Layer w0.25: C14.1@21.375,58.6 21.375,55.25 20.325,54.2 20.325,50.2 20.925,49.6 ; DA1.13 20.925,49.6 ; R22.1 R23.2 44.925,54 45.325,53.6 45.325,49.1 44.921,48.696 40.029,48.696 VD12.K 38.925,45.4 38.025,44.5 R20.2 26.525,44.5 26.225,44.8 26.225,45.4 25.825,45.8 20.825,45.8 20.325,46.3 20.325,49 20.925,49.6
NetC15_1: C15.1 R25.2 VD10.A | length 16.2
  Top Layer w0.25: C15.1 R25.2 41.125,52.1 VD10.A
NetC15_2: C15.2 DA1.14 VD13.A | length 15.5
  Top Layer w0.25: DA1.14 C15.2 25.25,54.125 25.525,54.4 28.525,54.4 29.26,55.135 29.26,58.954 29.406,59.1 VD13.A@31.225,59.1
NetC16_1: C16.1 R22.2 VD13.K | length 11.2
  Top Layer w0.25: VD13.K@37.225,59.1 R22.2 ; C16.1 VD13.K
NetDA1_2: DA1.2 R6.2 R9.1 | length 7.1
  Top Layer w0.25: R9.1 R6.2 14.369,49.394 DA1.2
NetDA1_3: DA1.3 R4.2 R8.2 | length 7.3
  Top Layer w0.25: R8.2 9.925,46.094 R4.2 13.753,46.794 13.801,46.842 14.317,46.842 DA1.3 ; DA1.3@14.468,46.794 DA1.3@14.573,46.9
NetDA1_10: DA1.10 R18.2 | length 3.2
  Top Layer w0.25: DA1.10 22.175,42 R18.2
NetDA1_12: DA1.12 R19.2 VD11.K | length 14.7
  Top Layer w0.25: DA1.12 R19.2 25.225,49.2 25.825,49.8 VD11.K
NetDD1_2: DD1.2 DD1.3 | length 1.3
  Top Layer w0.25: DD1.2 DD1.3
NetDD2_1: DD2.1 VD1.K VD2.A VD3.K | length 11.9
  Top Layer w0.25: VD1.K 11.025,19.375 11.05,19.4 DD2.1 VD2.A
NetDD2_13: DD2.13 R11.2 VD4.A VD5.K | length 19.8
  Top Layer w0.25: VD5.K@21.425,26.8 24.125,26.8 25.825,25.1 VD4.A ; DD2.13 VD4.A ; R11.2 VD4.A
NetDD3_5: DD3.5 DD6.2 | length 20.1
  Top Layer w0.25: DD3.5 35.705,25.78 v1(35.75,25.825) ; v1(39.825,25.8) 47.8,25.8 DD6.2
  Bottom Layer w0.25: v1(35.75,25.825) 35.775,25.8 v1(39.825,25.8)
NetDD3_6: DD3.6 DD4.10 | length 35.6
  Top Layer w0.25: DD3.6 38.25,27.05 40.125,28.925 40.125,31.351 40.378,31.604 62.679,31.604 DD4.10
NetDD4_1: DD4.1 DD5.1 DD5.6 DD6.4 | length 53.2
  Top Layer w0.25: DD5.1 59.425,22.825 59.725,23.125 70.05,23.125 71.925,21.25 71.925,22.4 75.625,26.1 75.625,39.45 DD4.1
  Bottom Layer w0.25: DD6.4 52.028,23.622 54.975,23.622 55.729,22.867 55.729,21.7 56.179,21.25 DD5.1@59.425,21.25
NetDD4_2: DD4.2 DD4.5 | length 8.4
  Top Layer w0.25: DD4.5 65.375,41.8 66.585,41.8 cw(c66.825,40.75) 67.065,41.8 69.085,41.8 cw(c69.325,40.75) 69.565,41.8 70.775,41.8 70.849,41.726 DD4.2
NetDD4_3: DD4.3 DD5.12 R5.2 R10.1 VD3.A VD5.A | length 97.2
  Top Layer w0.25: R5.2 6.325,13.375 R10.1 4.425,14.325 3.625,15.125 3.625,19.175 3.85,19.4 VD3.A 8.325,19.4 9.3,20.375 13.025,20.375 13.55,20.9 13.55,26.5 13.85,26.8 VD5.A 17.875,26.8 21.075,30 v1(30.175,30)
  Bottom Layer w0.25: v1@30.225,30 31.025,30.8 42.2,30.8 42.625,30.375 42.625,28.427 43.052,28 44.598,28 45,28.402 45,30.553 45.297,30.85 45.75,30.85 62.375,30.85 62.449,30.776 64.188,29.037 64.425,28.8 64.425,28.75 65.625,29.95 65.625,37.05 DD4.3
NetDD4_9: DD4.9 DD4.12 | length 8.9
  Top Layer w0.25: DD4.9 63.575,35 67.575,35 DD4.12
NetDD4_13: DD4.13 DD5.8 | length 5.7
  Top Layer w0.25: DD4.13 72.075,33.25 74.425,30.9 DD5.8@74.425,28.75
NetR3_1: R3.1 R4.1 X1.3 | length 25.2
  Top Layer w0.25: X1.3 3.174,28.825 3.025,28.974 R3.1 5.025,47.1 5.331,46.794 R4.1
NetR3_2: R3.2 R6.1 X1.1 | length 33.1
  Top Layer w0.25: X1.1 2.2,25.825 1.1,26.925 1.1,48.675 1.525,49.1 R3.2 4.825,49.1 5.119,49.394 R6.1
"Счёт -": C13.2 R21.2 X2.2 | length 63.2
  Top Layer w0.25: C13.2 48.65,40.05 48.65,41.825 49.021,42.196 57.144,42.196 57.179,42.231 75.494,42.231 76.025,41.7 76.025,39.621 76.029,39.617 76.029,16.579 72.125,12.675 X2.2
pads on no net: DD2.2 DD2.12 DD3.8 DD3.10 DD3.12 DD6.3 HG1.1 HG1.2 HG1.3 HG1.4 HG1.5 HG1.6 HG1.7 HG1.8 HG1.25 HG1.26 HG1.27 HG1.28 HG1.29 HG1.30 HG1.31 HG1.32 HG1.33 HG1.34 HG1.35 HG1.36 HG1.37 HG1.38 HG1.39 HG1.40 HG1.41 HG1.42 HG1.43 HG1.46 HG1.47 X1. X1.4 X2.

## Polygon pours and split planes (outlines as drawn)
GND on Bottom Layer "GND_L02_P000" (solid, remove dead copper, pour order 0): 0,65 80,65 80,0 0,0
GND on Top Layer "GND_L01_P001" (solid, pour order 1): 0,65 80,65 80,0 0,0

## Keep-outs
Keep-Out Layer:
  the board outline again, w0.254

## Other copper
Multi-Layer:
  pour cut-out: 73,0 80,0 80,7 73,7
  pour cut-out: 0,7 0,0 7,0 7,7
  pour cut-out: 7,65 0,65 0,58 7,58
  pour cut-out: 80,58 80,65 73,65 73,58